# EAGLE board first_iteration (EAGLE 9.6.2)
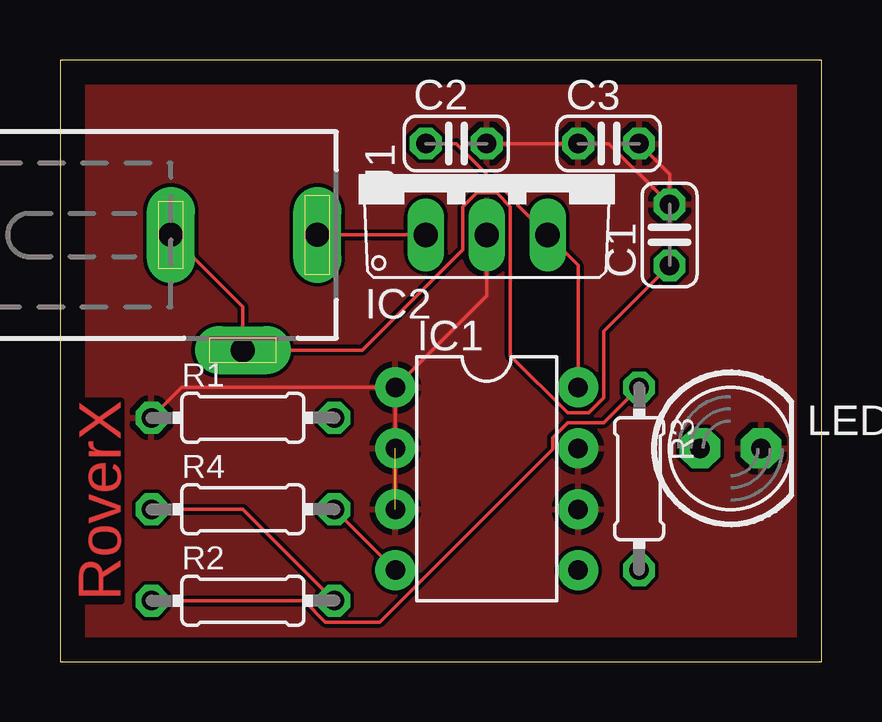
[diagram p0: board, top side]
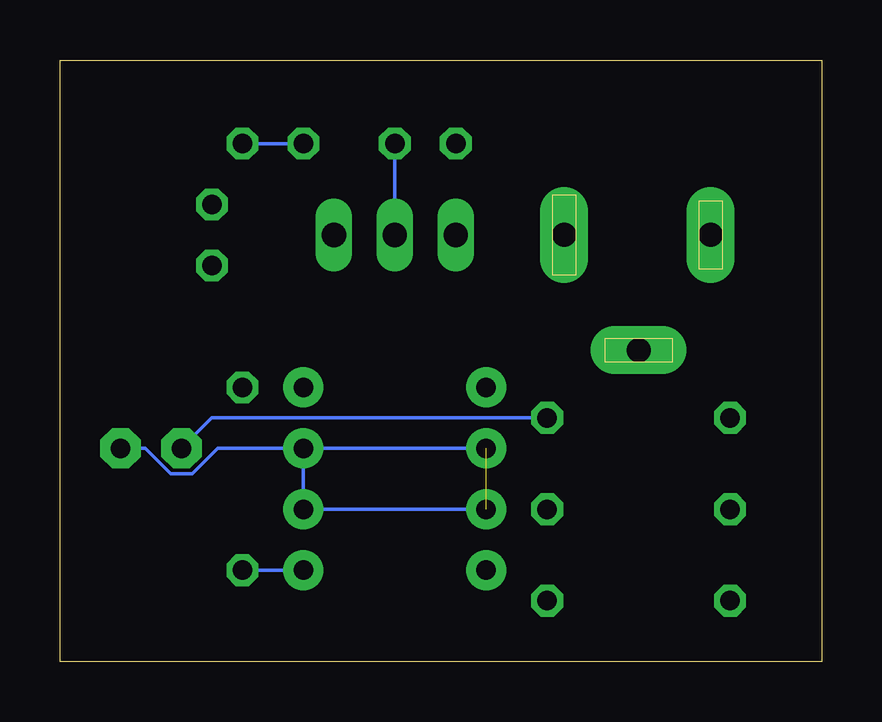
[diagram p1: board, bottom side, seen from below]

Size 31.73 x 25.07 mm. Coordinates in mm from the lower left corner, seen from the top.
Outline: 0,0 31.73,0 31.73,25.07 0,25.07 0,0
Copper layers (1*16): Top 0.035mm / dielectric 1.5mm / Bottom 0.035mm
Design rules "default": minimum track width 6mil, minimum drill 0.35mm, track to track 6mil, track to pad 6mil, pad to pad 6mil, via to via 6mil, smd to smd 6mil, copper to edge 40mil, drill to drill 6mil, minimum pad ring 10mil, minimum via ring 8mil, stop-mask expansion 4mil, vias tented up to drill 0mil, thermal gap 10mil

## Footprints (pad centres in the part's own frame; a part is rotated, then mirrored left to right if it is on the bottom)
C025-024X044 = drill 0.813 octagon: 1 -1.27,0; 2 1.27,0
DIL08-ROUND = drill 0.813 pad 1.676: 1 -3.81,-3.81; 2 -1.27,-3.81; 3 1.27,-3.81; 4 3.81,-3.81; 5 3.81,3.81; 6 1.27,3.81; 7 -1.27,3.81; 8 -3.81,3.81
TO220V = drill 1.016 long: 1 -2.54,-2.54; 2 0,-2.54; 3 2.54,-2.54
DCJ0202 = drill 1 pad 2 long: 1 0,3.1; 2 4.8,0; 3 0,-3
LED5MM = drill 0.813 pad 1.676 octagon: A -1.27,0; K 1.27,0
0204/7 = drill 0.813 octagon: 1 -3.81,0; 2 3.81,0

## Placement (x,y rotation side)
C1  0.1uf  [C025-024X044]  25.4,17.78 90 top
C2  [C025-024X044]  16.51,21.59 0 top
C3  [C025-024X044]  22.86,21.59 0 top
IC1  LM555N  [DIL08-ROUND]  17.78,7.62 270 top
IC2  788TV  [TO220V]  17.78,20.32 0 top
J1  DCJ0202  [DCJ0202]  7.62,17.78 270 top
LED1  [LED5MM]  27.94,8.89 0 top
R1  [0204/7]  7.62,10.16 0 top
R2  [0204/7]  7.62,2.54 0 top
R3  [0204/7]  24.13,7.62 270 top
R4  [0204/7]  7.62,6.35 0 top

## Library data of the parts
C1-C3 = rcl; SPICEPREFIX: C
IC1 LED1 = adafruit
IC2 = linear
J1 = con-jack; OC_FARNELL: unknown; OC_NEWARK: unknown
R1-R4 = rcl; SPICEPREFIX: R

## Nets
GND: C1.2 C2.2 C3.1 C3.2 IC1.1 IC1.2 IC1.3 IC1.6 IC1.7 IC2.2 LED1.K R1.1
N$1: C1.1 J1.2 J1.3
N$2: IC2.1 J1.1
N$3: C2.1 IC1.8 IC2.3
N$5: LED1.A R1.2
N$6: IC1.4 R4.2
N$7: R2.2 R4.1
N$8: R2.1 R3.1
N$9: IC1.5 R3.2

## Tracks (layer width: path | path; a pad name or v marks a point on that pad's centre or on a via)
GND  (1 unrouted)
  Top 0.152: R1.1 5.08,11.43 IC1.1 | IC1.3 IC1.1 | IC2.2 17.78,15.24 IC1.1 | C2.2 22.86,21.59 C1.2 25.4,20.32 C3.2
  Bottom 0.152: IC1.2 25.16,8.89 26.23,7.82 27.11,7.82 28.18,8.89 LED1.K | IC1.7 IC1.6 IC1.3 | C2.2 IC2.2 | C3.1 C3.2
  pour Top: 0,0 31.75,0 31.75,25.4 0,25.4
N$1
  Top 0.152: C1.1 22.66,13.77 22.66,10.99 22.03,10.36 21.15,10.36 18.77,12.74 18.77,18.95 18.19,19.53 17.37,19.53 16.79,18.95 16.79,17.17 12.6,12.98 J1.2 7.62,14.78 J1.3
N$2
  Top 0.152: J1.1 IC2.1
N$3
  Top 0.152: IC1.8 21.59,16.51 IC2.3 19.07,19.02 19.07,19.08 18.32,19.84 18.26,19.84 16.51,21.59 C2.1
N$5
  Bottom 0.152: R1.2 25.4,10.16 LED1.A
N$6
  Top 0.152: R4.2 IC1.4
N$7
  Top 0.152: R4.1 7.62,6.35 R2.2
N$8
  Top 0.152: R2.1 10.17,2.54 11.06,1.65 13.32,1.65 20.52,8.85 20.52,9.33 21.15,9.96 22.66,9.96 R3.1
N$9
  Bottom 0.152: IC1.5 R3.2

## Text on the board
Top: RoverX